# Altium PCB BACKUP_POWER.PcbDoc (part 2 of 2)
Units mm, origin at the board's own origin, x right, y up, seen from the top; angles counter-clockwise.
Board outline 100 x 100 mm, 2 copper layers (Top Layer, Bottom Layer); 154 components, 92 nets, 415 pads, 323 vias.
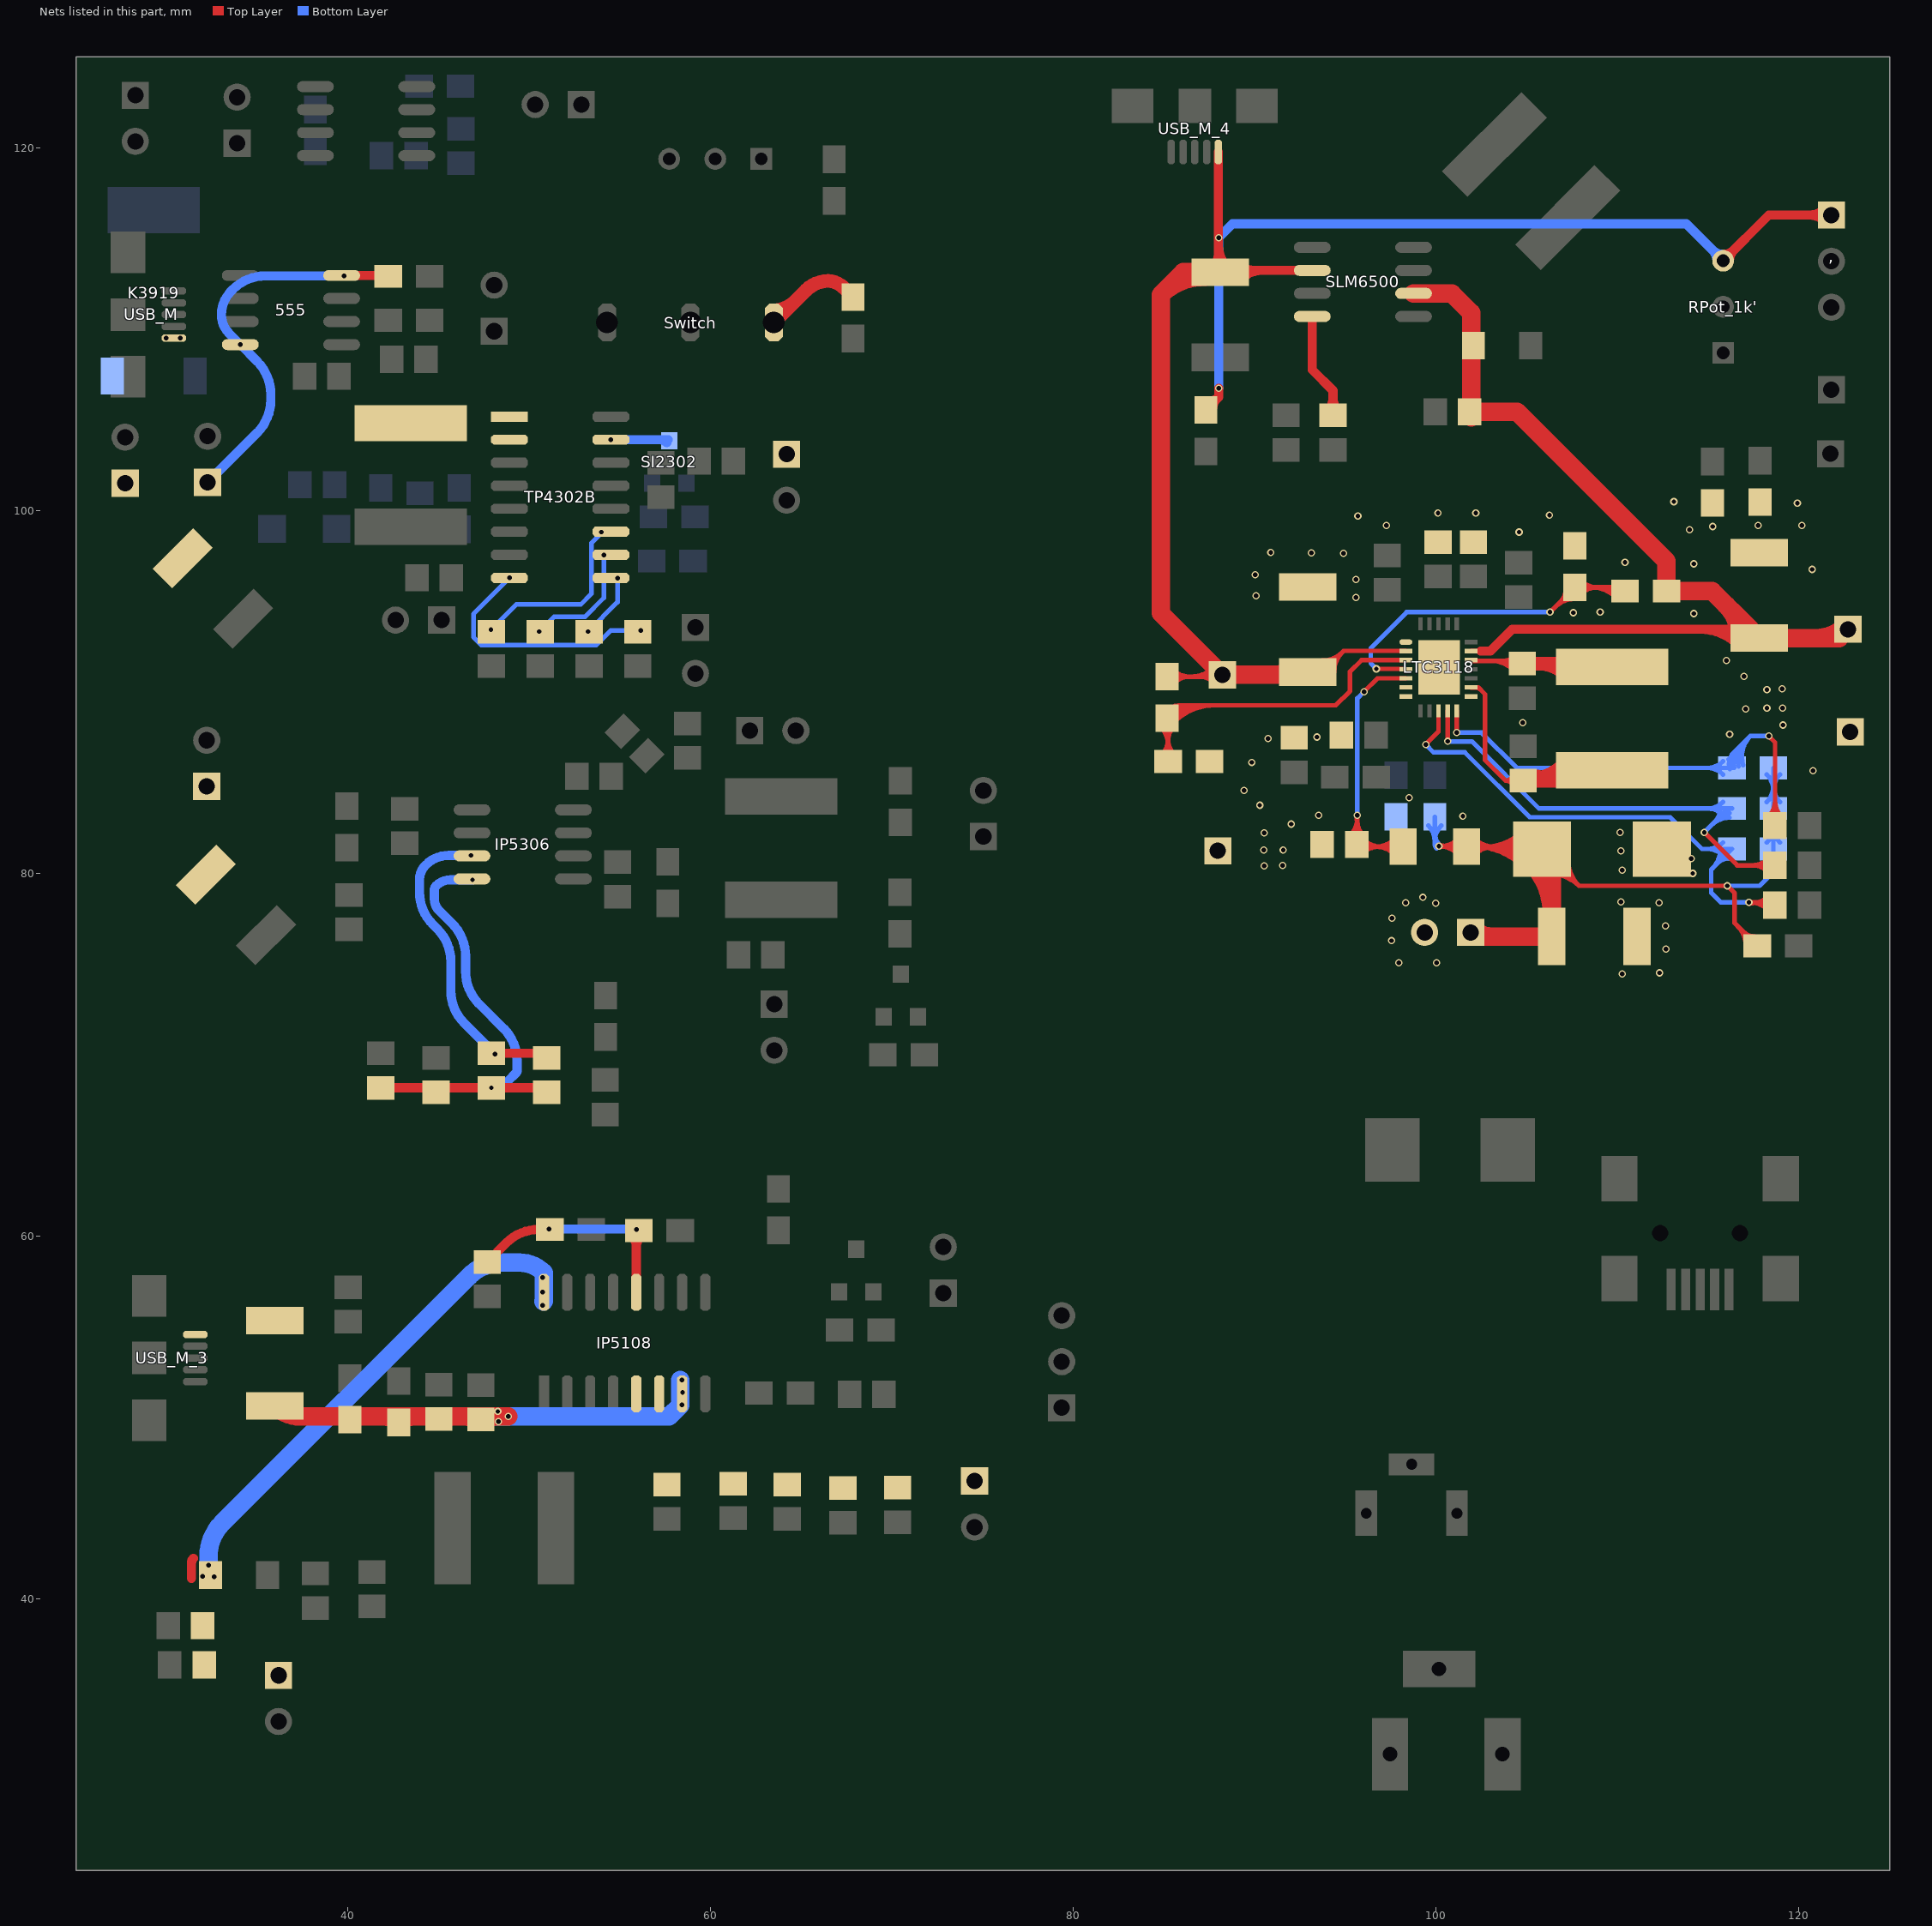
[diagram p2: the nets of this part, all layers, seen from the top]

## Via types
v1: diameter 0.406, hole 0.254, Top Layer to Bottom Layer, tented both sides, 316 vias
v2: diameter 3.8, hole 3, Top Layer to Bottom Layer, tented both sides, 4 vias
v3: diameter 1.6, hole 1.2, Top Layer to Bottom Layer, tented both sides, 3 vias

## Nets (pads, with @x,y where several pads share a name; then routed paths per layer and width w, separated by ;. In a path a pad name is that pad's centre, name@x,y a point inside that pad or via, vN(x,y) a via of type N, cw(c..) or ccw(c..) an arc to the next point about the centre after c; other vN are vias at no path point) (continued)
NetIP5306_3: IP5306.3 L3,.1 L4,.2 | length 17.7
  Top Layer w0.508: 47.904,70.062 50.343,70.062 cw(c50.343,69.2) 50.952,69.809
  Bottom Layer w0.508: v1(46.787,80.975) 45.56,80.975 ccw(c45.56,79.154) 44.272,80.442 ccw(c45.069,79.645) 43.942,79.645 43.942,78.954 ccw(c46.482,78.954) 44.686,77.158 44.925,76.919 cw(c43.129,75.122) 45.669,75.122 45.669,73.518 ccw(c48.209,73.518) 46.413,71.722 v1(48.108,70.028)
NetIP5306_4: IP5306.4 L1,.2 L2,.1 L3,.2 L4,.1 | length 24.8
  Top Layer w0.508: 41.808,68.162 v1(47.904,68.162) 50.343,68.162 cw(c50.343,67.3) 50.952,67.909
  Bottom Layer w0.508: v1(46.863,79.629) 45.654,79.629 ccw(c45.654,78.502) 44.856,79.299 ccw(c45.102,79.054) 44.755,79.054 44.755,78.588 ccw(c45.675,78.588) 45.024,77.937 45.738,77.223 cw(c43.942,75.427) 46.482,75.427 46.482,74.585 ccw(c49.022,74.585) 47.226,72.789 48.583,71.432 cw(c46.787,69.636) 49.327,69.636 49.327,69.139 cw(c49.082,69.139) 49.255,68.965 48.838,68.549 cw(c47.904,69.483) v1(47.904,68.162)
NetL1_1: L1.1 TP4302B.11 | length 10
  Bottom Layer w0.254: v1(47.879,93.421) 49.276,94.818 52.832,94.818 53.416,95.402 53.416,98.196 53.975,98.755 v1(53.975,98.806)
NetL2_1: L2.1 TP4302B.10 | length 6.7
  Bottom Layer w0.254: v1(50.546,93.32) 51.359,94.132 53.061,94.132 54.102,95.174 v1(54.102,97.536)
NetL3_1: L3.1 TP4302B.9 | length 3.6
  Bottom Layer w0.254: v1(53.238,93.32) 54.864,94.945 v1(54.864,96.266)
NetL4_1: L4.1 TP4302B.8 | length 13.8
  Bottom Layer w0.254: v1(48.903,96.281) 46.914,94.291 46.914,93.015 47.346,92.583 53.696,92.583 54.483,93.37 v1(56.134,93.37)
NetRED_2: RED.2 SLM6500.4 | length 7.4
  Top Layer w0.508: SLM6500.4@93.167,110.693 93.167,107.747 94.31,106.604 RED.2@94.31,105.242 ; RED.2@94.03,105.522 ccw(c93.354,106.198) 94.31,106.198 ccw(c95.266,106.198) RED.2@94.59,105.522
OUT_5V: 1K,.2 Switch.3 Vout_5V.1 | length 6.8
  Top Layer w0.762: Switch.3@63.48,110.363 65.267,112.15 cw(c66.472,110.945) 66.472,112.649 cw(c66.472,111.484) 67.296,112.308 67.843,111.76 ; Switch.3@63.48,111.032 ccw(c63.48,112.647) 64.622,111.505
PGND: 0,,.2 0,.2 1.8nf.1 4.7uf.2 22pf.1 22u.2 22uf,''.2 22uf,,''.2 47nf,.1 47nf.1 100K,,'.1 100K,,.1 100k.1 100uf'.2 "Vout 5V/1A.2" GNDv1.1 GNDv2.1 LTC3118.1 LTC3118.6 LTC3118.7 LTC3118.25
  other v1: 110.261,74.447 112.319,74.498 97.942,75.057 100.025,75.057 112.674,75.819 97.536,76.276 112.649,77.089 97.561,77.521 99.974,78.334 98.323,78.359 112.293,78.359 110.185,78.41 99.263,78.664 114.148,79.985 110.261,80.162 90.526,80.391 91.542,80.416 114.071,80.797 110.185,81.229 90.5,81.28 91.567,81.28 90.526,82.22 110.134,82.245 91.999,82.702 101.473,83.134 93.523,83.185 90.272,83.744 98.501,84.15 89.408,84.557 120.777,85.649 89.84,86.106 90.729,87.427 93.421,87.503 116.18,87.655 119.126,88.163 104.775,88.29 117.069,89.052 118.237,89.103 119.101,89.103 118.237,90.119 119.075,90.17 116.967,90.856 116.002,91.719 114.198,94.31 107.569,94.361 109.042,94.386 95.58,95.199 90.068,95.301 95.58,96.19 90.018,96.444 120.726,96.749 114.198,97.053 110.414,97.13 94.894,97.638 93.116,97.663 90.881,97.688 104.572,98.806 113.97,98.933 115.24,99.111 97.257,99.162 117.754,99.162 120.167,99.162 95.682,99.695 106.248,99.746 100.101,99.847 102.184,99.847 119.913,100.406 113.106,100.482
POW_GND: K3919.3 USB_M.5 Vin_5V.1
  other v1: 29.972,109.499 30.759,109.499
RUN1: 100K,,.2 100K,.1 LTC3118.3 | length 30.4
  Top Layer w0.254: 84.807,88.058 cw(c83.817,87.068) 85.217,87.068 ; 84.858,86.516 ccw(c83.991,87.383) 85.217,87.383 ccw(c86.443,87.383) 85.576,86.516 ; 84.987,88.238 cw(c84.43,87.682) 85.217,87.682 ; 84.987,88.851 cw(c85.963,87.874) 85.963,89.256 ; 85.166,88.671 cw(c86.577,87.261) 86.577,89.256 ; 85.217,86.157 85.217,88.494 85.166,88.544 85.877,89.256 ; 85.217,87.314 cw(c86.27,87.314) 85.525,88.058 ; 85.346,88.492 cw(c87.19,86.648) 87.19,89.256 ; 85.35,89.145 ccw(c85.529,89.604) 85.877,89.256 ; 85.525,88.312 cw(c87.803,86.035) 87.803,89.256 ; 85.673,88.708 cw(c86.375,88.758) 85.877,89.256 ; LTC3118.3@98.33,91.741 98.326,91.745 95.885,91.745 95.25,91.11 95.25,90.043 94.463,89.256 85.877,89.256
RUN2: 100K,'.1 100K,,'.2 LTC3118.4 | length 25.9
  Top Layer w0.254: v1(96.698,91.262) 98.309,91.262 LTC3118.4@98.33,91.241 ; v1(106.274,94.386) 107.645,95.758 110.211,95.758 110.414,95.555 ; 106.561,94.674 cw(c107.645,93.59) 107.645,95.123 ; 106.868,94.981 ccw(c106.217,95.631) 107.137,95.631 ; 106.995,95.108 cw(c107.645,94.457) 107.645,95.377 ; 108.004,95.399 cw(c108.872,94.532) 108.872,95.758 cw(c108.872,96.984) 108.004,96.117 ; 108.57,95.758 cw(c108.57,93.838) 109.928,95.196 ; 109.183,95.758 cw(c109.183,94.451) 110.107,95.375 ; 109.551,95.758 ccw(c109.551,96.291) 109.928,95.914
  Bottom Layer w0.254: v1(96.698,91.262) 96.393,91.567 96.393,92.405 98.374,94.386 v1(106.274,94.386)
SW: "2.2uH/5A SMD.1" TP4302B.1 TP4302B.2
SW1: 0.1uf,.2 3.3uH/5A,.1 LTC3118.17 | length 13.2
  Top Layer w0.254: LTC3118.17@101.93,91.741 101.963,91.707 104.594,91.707 104.75,91.552 ; 103.011,91.707 cw(c103.011,89.914) 104.28,91.182 ; 103.625,91.707 cw(c103.625,90.527) 104.459,91.362 ; 103.763,91.707 ccw(c103.763,92.439) 104.28,91.922
  Top Layer w0.762: 104.75,91.552 109.52,91.552 109.703,91.369 ; 105.667,91.552 cw(c105.667,89.433) 107.165,90.931 ; 106.55,91.552 ccw(c106.55,92.422) 107.165,91.807
SW2: 0.1uf,,.2 3.3uH/5A,.2 LTC3118.14 | length 18
  Top Layer w0.254: LTC3118.14@101.93,90.241 102.317,90.241 102.692,89.865 102.692,86.233 103.82,85.105 ; LTC3118.14@102.155,90.243 cw(c102.155,89.857) 102.427,90.13 ; 104.241,84.855 ccw(c103.82,84.626) 103.82,85.105 ; 104.241,85.355 cw(c103.82,85.585) 103.82,85.105 ; 104.8,85.105 103.82,85.105
  Top Layer w0.762: 105.133,84.971 cw(c105.772,84.602) 105.581,85.314 ; 106.606,85.105 ccw(c106.606,86.639) 107.705,85.569 ; 107.159,86.101 cw(c104.801,88.397) 104.801,85.105 109.139,85.105 109.703,85.669
SWT: SI2302.3 TP4302B.15 | length 3.6
  Bottom Layer w0.508: v1(54.491,103.901) SI2302.3@57.65,103.901 ; 57.154,103.901 cw(c57.154,103.312) SI2302.3@57.57,103.728
V1: 10K_1.2 LTC3118.10 V1.2 | length 35.5
  Top Layer w0.254: v1(99.422,87.097) 100.13,87.805 LTC3118.10@100.13,88.941 ; v1(117.246,78.384) 118.532,78.384 V1.2@118.684,78.232 ; v1@117.285,78.318 cw(c117.398,78.122) 117.457,78.341 ; v1@117.295,78.384 cw(c117.295,76.943) V1.2@118.314,77.962 ; 117.548,78.384 ccw(c117.548,79.468) V1.2@118.314,78.702 ; 117.908,78.384 cw(c117.908,77.556) V1.2@118.494,78.142
  Bottom Layer w0.254: v1(99.422,87.097) 99.854,86.665 101.575,86.665 105.156,83.083 112.903,83.083 114.656,81.331 10K_1.2@116.307,81.331 115.164,80.188 115.164,78.918 115.697,78.384 v1(117.246,78.384) ; 115.223,80.247 ccw(c114.139,81.331) 10K_1.2@115.672,81.331 ; 115.529,80.553 cw(c116.18,79.903) 10K_1.2@116.18,80.823 ; 115.656,80.68 ccw(c115.006,81.331) 10K_1.2@115.926,81.331 ; 10K_1.2@115.82,80.972 ccw(c114.953,80.104) 114.953,81.331 ccw(c114.953,82.557) 10K_1.2@115.82,81.69
V2: 10K_2.2 LTC3118.11 V2.2 | length 31.9
  Top Layer w0.254: v1(100.63,87.27) LTC3118.11@100.63,88.941 ; v1(114.783,82.245) 116.599,80.429 V2.2@118.684,80.429 ; V2.2@118.314,80.059 ccw(c117.421,79.166) 117.421,80.429 ccw(c117.421,81.692) V2.2@118.314,80.799
  Bottom Layer w0.254: v1(100.63,87.27) 100.638,87.262 101.968,87.262 105.664,83.566 10K_2.2@116.103,83.566 ; v1(114.783,82.245) 10K_2.2@116.103,83.566 ; 115.182,82.645 cw(c116.18,81.648) 10K_2.2@116.18,83.058 ; 115.366,82.829 ccw(c114.629,83.566) 10K_2.2@115.672,83.566 ; 10K_2.2@115.616,83.079 cw(c116.18,82.515) 10K_2.2@116.18,83.312 ; 10K_2.2@115.82,83.207 ccw(c114.953,82.34) 114.953,83.566 ccw(c114.953,84.792) 10K_2.2@115.82,83.925 ; 10K_2.2@116.307,83.566 10K_2.2@116.103,83.566
V_GOOD: 10K_3.2 LTC3118.12 V_good.2 | length 35.5
  Top Layer w0.254: v1(101.13,87.744) LTC3118.12@101.13,88.941 ; V_good.2@118.314,83.096 ccw(c117.421,83.989) 118.684,83.989 ccw(c119.947,83.989) V_good.2@119.054,83.096 ; v1(118.339,87.554) 118.684,87.208 V_good.2@118.684,82.626
  Bottom Layer w0.254: v1(101.13,87.744) 102.502,87.744 104.445,85.801 10K_3.2@116.307,85.801 116.307,86.538 ; 10K_3.2@115.82,85.442 ccw(c114.953,84.575) 114.953,85.801 ccw(c114.953,87.028) 10K_3.2@115.82,86.16 ; 10K_3.2@116.126,86.276 ccw(c116.027,86.538) 116.307,86.538 ; 10K_3.2@116.19,85.728 cw(c117.08,85.997) 116.423,86.654 ; 10K_3.2@116.434,85.801 cw(c117.541,86.136) 116.723,86.954 ; 10K_3.2@116.487,86.276 cw(c116.587,86.538) 116.307,86.538 ; 10K_3.2@116.677,85.875 cw(c118.001,86.276) 117.023,87.254 ; 10K_3.2@116.92,85.948 cw(c118.461,86.415) 117.323,87.554 ; v1(118.339,87.554) 117.323,87.554 ; 116.307,86.538 117.323,87.554
VBAT: 10mR.2 10u'.1 104''.1 BAT_4.2V_3.1 IP5108.16 | length 29.6
  Top Layer w0.508: 31.369,41.123 31.369,41.97 cw(c31.716,41.97) 31.471,42.215
  Bottom Layer w1.016: 32.309,41.173 32.309,42.356 cw(c34.849,42.356) 33.053,44.153 46.678,57.778 cw(c48.474,55.982) 48.474,58.522 49.451,58.522 cw(c49.451,56.614) 50.8,57.963 50.8,56.449 cw(c50.713,56.449) 50.775,56.388
  other v1: 32.614,41.199 31.979,41.224 32.309,41.834 50.724,56.159 50.724,56.896 50.724,57.709
VCC: 4.7uf.1 5819.2 LTC3118.5 | length 23
  Top Layer w0.254: 4.7uf.1@95.246,82.055 ccw(c94.255,83.045) v1@95.656,83.045 ; 4.7uf.1@95.426,81.875 ccw(c94.868,82.432) 95.656,82.432 ; v1@95.59,83.147 cw(c95.324,82.993) 95.621,82.914 ; 95.656,82.849 ccw(c96.78,82.849) 4.7uf.1@95.986,82.055 ; v1(95.656,83.185) 95.656,81.544 95.743,81.458 5819.2@98.176,81.458 ; 4.7uf.1@95.806,81.675 ccw(c96.33,82.199) 96.33,81.458 ; 4.7uf.1@95.986,81.115 cw(c96.813,80.287) 96.813,81.458 ; 4.7uf.1@95.986,81.855 ccw(c96.944,82.813) 96.944,81.458 ; v1(96.025,90.005) 96.761,90.741 LTC3118.5@98.33,90.741 ; 5819.2@97.736,81.017 ccw(c96.672,79.954) 96.672,81.458 ccw(c96.672,82.962) 5819.2@97.736,81.898 ; 5819.2@97.915,81.197 ccw(c97.285,80.567) 97.285,81.458 ccw(c97.285,82.349) 5819.2@97.915,81.719
  Bottom Layer w0.254: v1(95.656,83.185) 95.656,89.637 v1(96.025,90.005)
VCC_5108: "Fuse 2A 8V,,.1" USB_M_3.1
VIN: 1kr.2 2R,.2 10uf_1,,.1 104.1 "Fuse 2A 8V,,.2" IP5108.7 | length 29.2
  Top Layer w1.016: 35.966,50.622 ccw(c37.377,52.033) 37.377,50.038 v1(48.844,50.038) ; 42.002,50.038 cw(c42.002,49.038) 1kr.2@42.709,49.745 ; 1kr.2@42.889,49.745 cw(c43.596,49.038) 43.596,50.038 ; 44.235,50.038 cw(c44.235,49.227) 44.808,49.8 ; 45.209,49.8 cw(c45.783,49.227) 45.783,50.038 ; 46.485,50.038 cw(c46.485,49.14) 104.1@47.12,49.775 ; 104.1@47.521,49.775 cw(c48.156,49.14) 48.156,50.038
  Bottom Layer w1.016: 48.057,50.038 v1(48.844,50.038) 57.709,50.038 58.318,50.648 v1@58.318,52.045
  other v1: 48.285,49.759 48.26,50.317 58.42,50.673 58.445,51.359 58.42,52.045
VIN1: 1K,'.1 22uf,''.1 47uf'.1 100K,.2 ,.1 LTC3118.2 RPot_1k'.3 SLM6500.2 USB_M_4.1 VIN1.1 | length 120.6
  Top Layer w0.254: 85.166,90.83 88.113,90.83 VIN1.1@88.214,90.932 ; 85.525,90.471 cw(c86.393,89.604) 86.393,90.83 cw(c86.393,92.057) 85.525,91.19 ; 86.465,90.83 ccw(c86.465,92.681) VIN1.1@87.774,91.373 ; 86.955,90.83 cw(c86.955,89.673) VIN1.1@87.774,90.491 ; 87.078,90.83 ccw(c87.078,92.068) VIN1.1@87.953,91.193 ; 93.599,90.932 92.761,90.932 92.913,91.084 93.726,91.084 94.882,92.241 ; 93.739,91.465 ccw(c93.739,92.355) 94.367,91.726 ; 93.739,91.719 ccw(c93.739,93.222) 94.801,92.159 ; 94.12,91.084 cw(c95.07,91.084) 94.398,91.756 ; 94.374,91.084 cw(c95.937,91.084) 94.832,92.19 ; 94.882,92.253 LTC3118.2@98.33,92.253
  Top Layer w0.508: 87.3,105.537 88.011,106.248 ; 87.362,106.04 ccw(c87.484,106.775) 88.011,106.248 ; 87.681,105.664 cw(c88.294,105.664) 87.86,106.098 ; 47uf'.1@87.728,113.491 ccw(c87.095,114.124) 87.99,114.124 ; 87.99,114.592 ccw(c89.548,114.592) 47uf'.1@88.446,113.491 ; USB_M_4.1@87.99,119.761 87.99,113.229 47uf'.1@88.087,113.132 88.189,113.233 SLM6500.2@93.167,113.233 ; v1(88.011,106.731) 88.011,106.248 ; 47uf'.1@89.272,112.772 cw(c90.384,111.66) 90.384,113.233 ; 47uf'.1@89.272,113.491 ccw(c89.894,114.113) 89.894,113.233 ; RPot_1k'.3@115.824,113.767 118.339,116.281 121.793,116.281 ; RPot_1k'.3@115.824,114.113 ccw(c115.824,114.948) 116.415,114.357 ccw(c117.005,113.767) RPot_1k'.3@116.17,113.767 ; 121.442,115.93 ccw(c120.596,115.084) 120.596,116.281 ccw(c120.596,117.479) 121.442,116.632
  Top Layer w1.016: 47uf'.1@87.258,112.878 ccw(c87.203,109.495) 84.811,111.887 ; 47uf'.1@88.087,113.132 86.055,113.132 84.811,111.887 ; 91.107,90.932 ccw(c91.107,92.066) 91.908,91.264 ; 92.761,90.932 VIN1.1@88.214,90.932 84.811,94.336 84.811,111.887
  Bottom Layer w0.508: v1(88.011,106.731) v1(88.011,115.037) 88.773,115.799 113.792,115.799 RPot_1k'.3@115.824,113.767 ; RPot_1k'.3@115.478,113.767 ccw(c114.643,113.767) 115.233,114.357 ccw(c115.824,114.948) RPot_1k'.3@115.824,114.113
VIN2: 0.067.1 22uf,'.2 22uf,,''.1 100K,'.2 LTC3118.18 SLM6500.6 VIN2.1 | length 59.7
  Top Layer w0.254: LTC3118.18@101.93,92.241 102.452,92.241 ; 117.704,93.447 117.805,93.345
  Top Layer w0.508: 102.452,92.241 102.985,92.241 104.191,93.447 117.323,93.447 117.704,93.447 ; 114.588,93.447 cw(c114.588,90.572) 116.62,92.605 ; 115.815,93.447 cw(c115.815,91.799) 116.98,92.964
  Top Layer w1.016: SLM6500.6@98.755,111.963 100.863,111.963 101.94,110.886 101.94,105.435 ; 101.839,105.435 101.94,105.435 ; 101.94,105.131 101.94,105.435 ; 115.962,94.807 cw(c114.12,92.964) 116.726,92.964 ; 117.323,93.447 115.214,95.555 112.7,95.555 112.7,97.206 104.47,105.435 101.94,105.435 ; 117.805,92.964 122.225,92.964 VIN2.1@122.707,93.447 ; 120.958,92.964 ccw(c120.958,95.196) VIN2.1@122.536,93.618
VIN_5V: 135k.1 555.4 555.8 "Fuse 2A 8V.1" P_2_4302.1 | length 21.9
  Top Layer w0.508: 555.8@39.649,112.954 135k.1@42.164,112.954
  Bottom Layer w0.508: P_2_4302.1@32.258,101.549 34.994,104.285 ccw(c33.198,106.081) 35.738,106.081 35.738,106.415 ccw(c33.198,106.415) 34.994,108.211 v1(34.061,109.144) 33.451,109.754 cw(c34.492,110.795) 33.02,110.795 cw(c34.86,110.795) 33.559,112.096 33.648,112.184 cw(c35.444,110.388) 35.444,112.928 v1(39.776,112.928)
VIN_5V_2: "Fuse 2A 8V,.1" P_2_5306.1
VOUT: 3.3nf.2 10uf''.1 10uf'.1 47uf.1 104,.1 IP5108.5 IP5108.6 Vout_5V_3.1
VOUT_3118: 1.5k.1 10K_1.1 10K_2.1 10K_3.1 22u.1 100uf'.1 402k.2 5819.1 "Vout 5V/1A.1" LTC3118.13 | length 91.3
  Top Layer w0.254: v1@100.19,81.549 ccw(c100.318,81.771) 100.384,81.524 ; v1@100.233,81.483 ccw(c100.233,82.901) 5819.1@101.236,81.898 ; 100.749,81.483 cw(c100.749,80.566) 5819.1@101.41,81.202 ; 100.847,81.483 ccw(c100.847,82.287) 5819.1@101.415,81.719 ; 5819.1@101.227,81.026 ccw(c100.152,79.991) v1(100.152,81.483) 101.651,81.483 5819.1@101.676,81.458 105.715,81.458 100uf'.1@105.842,81.331 106.375,80.797 107.874,79.299 ; 5819.1@101.937,81.197 cw(c102.567,80.567) 102.567,81.458 cw(c102.567,82.349) 5819.1@101.937,81.719 ; 5819.1@102.085,81.458 cw(c102.085,77.649) 100uf'.1@104.778,80.342 ; 5819.1@102.117,81.017 cw(c103.18,79.954) 103.18,81.458 cw(c103.18,82.962) 5819.1@102.117,81.898 ; 100uf'.1@104.778,82.319 cw(c102.698,84.399) 102.698,81.458 cw(c102.698,78.262) 100uf'.1@104.958,80.522 ; 100uf'.1@104.958,82.14 cw(c103.312,83.786) 103.312,81.458 cw(c103.312,78.876) 100uf'.1@105.137,80.701 ; 100uf'.1@105.137,81.96 cw(c103.925,83.173) 103.925,81.458 cw(c103.925,79.489) 100uf'.1@105.317,80.881 ; 100uf'.1@106.01,80.446 cw(c106.152,79.084) 100uf'.1@107.12,80.052 ; 100uf'.1@106.036,80.193 cw(c106.224,78.402) 107.497,79.676 ; 100uf'.1@106.063,79.94 cw(c106.295,77.721) 107.874,79.299 ; 100uf'.1@106.795,81.185 ccw(c108.139,80.961) 100uf'.1@107.175,79.997 ; 100uf'.1@107.045,81.143 ccw(c108.738,80.861) 107.525,79.648 ; 100uf'.1@107.296,81.101 ccw(c109.337,80.762) 107.874,79.299 ; 116.62,77.081 cw(c115.536,75.997) 1.5k.1@117.069,75.997 ; 116.926,76.774 ccw(c117.577,77.425) 1.5k.1@117.577,76.505 ; 117.053,76.647 cw(c116.403,75.997) 1.5k.1@117.323,75.997 ; 1.5k.1@117.704,75.997 116.459,77.241 116.459,78.892 v1(116.053,79.299) 107.874,79.299
  Top Layer w1.016: 101.905,76.733 102.133,76.505 22u.1@106.375,76.505 100uf'.1@106.375,80.797 ; 102.076,76.905 ccw(c103.041,77.87) 103.041,76.505 ; 100uf'.1@105.198,80.612 cw(c102.355,77.769) 22u.1@106.375,77.769
  Bottom Layer w0.254: 402k.2@99.564,82.623 cw(c98.697,81.755) 99.924,81.755 cw(c101.15,81.755) 402k.2@100.283,82.623 ; 99.924,81.606 ccw(c100.275,81.606) v1@100.026,81.357 ; 99.924,82.219 ccw(c100.888,82.219) v1@100.206,81.537 ; 402k.2@99.924,83.109 99.924,81.712 v1(100.152,81.483) ; v1(116.053,79.299) 117.831,79.299 118.593,80.061 10K_1.1@118.593,81.331 10K_3.1@118.593,85.801 ; 10K_1.1@118.233,80.972 cw(c117.366,80.104) 118.593,80.104 cw(c119.819,80.104) 10K_1.1@118.952,80.972 ; 10K_1.1@118.233,81.69 ccw(c117.366,82.557) 118.593,82.557 ccw(c119.819,82.557) 10K_1.1@118.952,81.69 ; 10K_2.1@118.233,83.207 cw(c117.366,82.34) 118.593,82.34 cw(c119.819,82.34) 10K_2.1@118.952,83.207 ; 10K_2.1@118.233,83.925 ccw(c117.366,84.792) 118.593,84.792 ccw(c119.819,84.792) 10K_2.1@118.952,83.925 ; 10K_3.1@118.233,85.442 cw(c117.366,84.575) 118.593,84.575 cw(c119.819,84.575) 10K_3.1@118.952,85.442
VREG: 2.2uf.2 3.3K,.1 3.3K.1 IP5108.12 | length 14.2
  Top Layer w0.508: 2.2uf.2@47.676,58.557 48.725,59.606 cw(c50.521,57.81) 50.521,60.35 3.3K.1@51.13,60.35 ; 55.636,60.03 cw(c55.021,59.415) 55.891,59.415 ; IP5108.12@55.891,56.879 55.891,59.958 ; 55.891,59.345 cw(c56.86,59.345) 56.175,60.03 ; 55.891,59.958 cw(c56.374,59.958) 56.032,60.3 ccw(c56.374,59.958) 55.891,59.958
  Bottom Layer w0.508: v1(51.079,60.376) 55.844,60.376 cw(c55.844,60.289) v1(55.905,60.35)
pads on no net: Designator194.1 Designator194.2 Designator196.1 Designator196.2 Designator196.3 Designator196.4 Designator196.5 Designator196.MH1 Designator196.MH2 Designator200.1 Designator200.2 Designator200.3 Designator201.1 Designator201.2 Designator201.3 IP5108.13 Switch.1 USB_M.2 USB_M.3 USB_M.4 USB_M.6 USB_M.7 USB_M.8 USB_M_3.2 USB_M_3.3 USB_M_3.4 USB_M_3.6 USB_M_3.7 USB_M_3.8 USB_M_4.2 USB_M_4.3 USB_M_4.4 USB_M_4.6 USB_M_4.7 USB_M_4.8
copper on no net:
  other v2: 91.669,27.661 76.327,64.846 91.669,65.862 76.327,121.361

## Polygon pours and split planes (outlines as drawn)
PGND on Top Layer "Top Layer-No Net" (solid, pour order 45): 81.509,100.686 81.509,76.505 ccw(c84.049,76.505) 84.049,73.965 120.371,73.965 121.869,73.965 ccw(c121.869,76.505) 124.409,76.505 124.409,97.866 124.409,99.847 ccw(c121.869,99.847) 121.869,102.387 83.744,102.387 83.718,102.387 ccw(c83.718,100.178) 81.509,100.178
GND_6500 on Top Layer "Top Layer-No Net" (solid, pour order 41): 81.407,124.409 81.407,104.191 ccw(c83.947,104.191) 83.947,101.651 116.586,101.651 121.945,101.651 ccw(c121.945,104.191) 124.485,104.191 124.485,120.498 124.485,121.869 ccw(c121.945,121.869) 121.945,124.409 82.448,124.409
VOUT_3118 on Top Layer "Top Layer-No Net" (solid, pour order 33): 101.524,89.84 101.524,85.095 ccw(c103.865,85.095) 102.21,83.439 102.913,82.735 cw(c101.117,80.939) 103.657,80.939 103.657,80.416 ccw(c104.393,80.416) 103.873,79.896 104.496,79.273 ccw(c104.68,79.457) 104.68,79.197 107.34,79.197 ccw(c107.34,79.688) 107.687,79.341 107.823,79.477 ccw(c107.639,79.661) 107.899,79.661 107.899,82.956 ccw(c106.427,81.485) 106.427,83.566 104.623,83.566 cw(c104.623,85.038) 103.582,83.997 102.743,84.836 cw(c103.663,85.756) 102.362,85.756 102.362,89.637 102.362,89.793 ccw(c102.189,89.793) 102.311,89.916 ccw(c102.25,89.855) 102.25,89.941 101.6,89.941 101.524,89.941
GND on Top Layer "Top Layer-No Net" (solid, pour order 54): 26.702,125.178 25.051,123.527 25.051,91.103 26.137,89.992 26.162,89.586 25.044,88.519 25.044,63.932 26.873,61.57 81.255,61.671 80.975,125.178
GND_5108 on Top Layer "Top Layer-No Net" (solid, pour order 52): 26.848,61.392 25,59.036 24.968,28.194 25.959,26.06 28.594,25 82.728,24.968 82.728,59.817 81.204,61.493 27.534,61.417
VBAT on Top Layer "Top Layer-No Net" (solid, pour order 50): 31.344,41.656 ccw(c31.895,41.104) 31.115,41.104 31.115,39.776 31.115,35.756 ccw(c31.895,35.756) 31.344,35.204 ccw(c32.447,36.308) 32.447,34.747 37.059,34.747 ccw(c36.507,35.299) 37.287,35.299 37.287,35.484 37.287,36.247 ccw(c36.247,36.247) 36.982,36.982 ccw(c36.553,36.553) 36.553,37.16 33.884,37.16 cw(c35.049,38.325) 33.401,38.325 33.401,41.707 33.401,41.906 ccw(c32.534,41.906) 33.147,42.52 cw(c33.086,42.581) 33.086,42.494 31.598,42.494 31.538,42.494 ccw(c31.538,42.147) 31.293,42.393
CSIN on Top Layer "Top Layer-No Net" (solid, pour order 49): 44.196,46.965 44.196,45.401 cw(c41.656,45.401) 43.452,43.604 43.409,43.561 43.238,43.391 cw(c41.442,45.187) 41.442,42.647 34.798,42.647 ccw(c35.534,41.911) 34.493,41.911 34.493,40.335 ccw(c34.8,40.642) 34.8,40.208 35.687,40.208 36.574,40.208 ccw(c36.574,40.642) 36.881,40.335 cw(c37.31,39.906) 37.31,40.513 42.139,40.513 46.595,40.513 ccw(c46.595,41.467) 47.269,40.792 ccw(c47.208,40.854) 47.295,40.854 47.295,47.092 ccw(c46.927,46.724) 46.927,47.244 44.45,47.244 44.38,47.244 ccw(c44.38,46.984) 44.196,47.168
VOUT on Top Layer "Top Layer-No Net" (solid, pour order 48): 55.397,51.714 55.397,47.737 ccw(c57.937,47.737) 56.141,45.941 56.718,45.364 ccw(c57.086,45.732) 57.086,45.212 75.26,45.212 ccw(c75.26,45.764) 75.65,45.374 75.87,45.593 cw(c75.931,45.654) 75.844,45.654 75.844,47.473 ccw(c75.476,47.105) 75.476,47.625 59.055,47.625 58.529,48.151 cw(c60.325,49.947) 57.785,49.947 57.785,50.546 57.785,52.143 ccw(c56.918,52.143) 57.531,52.756 ccw(c57.347,52.572) 57.347,52.832 55.474,52.832
LX on Top Layer "Top Layer-No Net" (solid, pour order 47): 52.832,52.045 52.832,50.633 cw(c50.292,50.633) 52.088,48.837 50.546,47.295 ccw(c51.404,46.436) 50.19,46.436 50.19,40.742 ccw(c50.865,40.742) 50.388,40.265 50.419,40.234 ccw(c50.542,40.356) 50.542,40.183 52.476,40.183 52.555,40.183 ccw(c52.555,40.79) 52.984,40.361 ccw(c52.371,40.974) 53.238,40.974 53.238,47.498 cw(c53.606,47.498) 53.346,47.758 54.737,49.149 ccw(c53.572,50.314) 55.22,50.314 55.22,52.426 55.22,52.439 ccw(c54.699,52.439) 55.067,52.807 ccw(c54.945,52.684) 54.945,52.857 52.934,52.857
VCC_5108 on Top Layer "Top Layer-No Net" (solid, pour order 46): 30.607,54.534 ccw(c31.098,55.024) 31.098,54.331 32.715,54.331 37.677,54.331 ccw(c37.677,54.677) 37.922,54.432 ccw(c37.37,54.984) 38.151,54.984 38.151,56.236 ccw(c37.538,55.622) 37.538,56.49 33.909,56.49 ccw(c33.909,56.06) 33.605,56.364 32.842,55.601 cw(c31.861,56.582) 31.861,55.194 30.709,55.194
Net2R_2 on Top Layer "Top Layer-No Net" (solid, pour order 43): 33.63,75.514 34.607,74.537 ccw(c34.823,74.754) 34.823,74.447 ccw(c34.823,74.938) 35.17,74.591 37.744,77.165 ccw(c36.641,78.269) 38.202,78.269 38.202,82.042 38.296,82.136 cw(c40.092,80.34) 40.092,82.88 47.879,82.88 48.069,83.07 ccw(c47.852,83.287) 48.158,83.287 48.158,83.552 ccw(c47.204,83.552) 47.879,84.226 ccw(c47.143,83.491) 47.143,84.531 38.405,84.531 ccw(c38.405,83.427) 37.624,84.208 36.728,83.312 36.304,82.888 ccw(c38.1,81.091) 35.56,81.091 35.56,79.248 cw(c34.272,79.248) 35.183,78.337 33.503,76.657 ccw(c33.993,76.167) 33.299,76.167 33.299,76.022
VIN_5V_2 on Top Layer "Top Layer-No Net" (solid, pour order 42): 29.972,85.065 29.972,79.995 ccw(c32.512,79.995) 30.716,78.199 31.14,77.775 ccw(c31.14,79.798) 32.571,78.367 33.503,79.299 ccw(c31.847,80.954) 34.188,80.954 34.188,84.836 33.369,85.656 ccw(c32.588,84.875) 32.588,85.979 30.609,85.979 ccw(c30.609,85.545) 30.302,85.852
Net10uf_3_2 on Top Layer "Top Layer-No Net" (solid, pour order 38): 53.238,100.965 ccw(c53.545,101.272) 53.545,100.838 55.88,100.838 56.01,100.708 cw(c55.403,100.101) 56.261,100.101 ccw(c57.365,101.205) 57.365,99.644 64.795,99.644 64.807,99.655 ccw(c63.853,100.609) 65.202,100.609 65.202,100.682 ccw(c64.335,100.682) 64.948,101.295 ccw(c64.457,100.805) 64.457,101.498 56.82,101.498 ccw(c56.758,101.498) 56.802,101.542 56.617,101.727 ccw(c56.31,101.42) 56.31,101.854 53.238,101.854
OUT_5V on Top Layer "Top Layer-No Net" (solid, pour order 37): 62.662,110.973 62.662,103.592 ccw(c65.202,103.592) 63.406,101.796 63.525,101.676 ccw(c63.587,101.738) 63.587,101.651 65.253,101.651 ccw(c64.455,102.448) 65.583,102.448 65.583,104.089 65.583,109.362 ccw(c63.043,109.362) 64.839,111.158 63.932,112.065 63.802,112.065 ccw(c63.802,110.417) 62.636,111.582
Net10uf_3_1 on Top Layer "Top Layer-No Net" (solid, pour order 36): 53.315,102.006 59.426,102.006 ccw(c59.426,103.134) 60.223,102.337 ccw(c60.039,102.521) 60.3,102.521 60.3,111.557 ccw(c59.564,110.821) 59.564,111.862 58.623,111.862 58.51,111.862 ccw(c58.51,110.908) 57.836,111.582 ccw(c58.51,110.908) 57.556,110.908 57.556,104.191 cw(c56.269,105.479) 56.269,103.657 56.083,103.657 ccw(c56.083,103.596) 56.04,103.639 55.651,103.251 53.796,103.251 ccw(c53.796,102.21) 53.061,102.946 cw(c52.938,102.824) 53.111,102.824 53.111,102.006
VIN_5V on Top Layer "Top Layer-No Net" (solid, pour order 34): 31.115,102.438 31.115,101.128 cw(c28.575,101.128) 30.371,99.332 28.346,97.307 ccw(c30.247,97.307) 28.903,95.963 29.693,95.174 ccw(c29.693,97.32) 31.21,95.802 33.122,97.714 ccw(c32.14,98.695) 33.528,98.695 33.528,102.438 ccw(c32.915,101.825) 32.915,102.692 31.394,102.692 31.324,102.692 ccw(c31.324,102.432) 31.14,102.616
5V_IN on Top Layer "Top Layer-No Net" (solid, pour order 32): 29.54,112.446 29.54,112.014 ccw(c29.718,112.014) 29.718,111.836 31.09,111.836 cw(c31.09,111.379) 31.547,111.379 31.547,107.823 cw(c29.007,107.823) 29.007,105.283 27.127,105.283 ccw(c27.127,104.572) 26.416,104.572 26.416,103.556 ccw(c27.026,103.556) 27.026,102.946 32.233,102.946 ccw(c32.233,104.14) 33.426,104.14 33.426,104.292 33.426,107.544 ccw(c32.791,107.544) 32.791,108.179 cw(c32.791,108.331) 32.639,108.331 32.639,111.608 ccw(c31.598,111.608) 31.598,112.649 29.667,112.649 29.616,112.649 ccw(c29.616,112.573) 29.54,112.573
SW on Top Layer "Top Layer-No Net" (solid, pour order 30): 47.6,103.276 49.479,103.276 ccw(c49.479,104.038) 50.241,104.038 50.241,105.486 ccw(c49.657,105.486) 49.657,106.07 40.361,106.07 ccw(c40.361,105.486) 39.776,105.486 39.776,104.419 ccw(c40.919,104.419) 40.919,103.276
BAT on Top Layer "Top Layer-No Net" (solid, pour order 29): 44.12,94.945 ccw(c44.181,94.884) 44.094,94.884 44.094,92.964 ccw(c44.217,92.964) 44.13,92.877 44.145,92.862 ccw(c44.207,92.924) 44.207,92.837 46.101,92.837 ccw(c46.101,92.898) 46.144,92.855 46.203,92.913 ccw(c45.037,94.078) 46.685,94.078 46.685,96.241 cw(c46.869,96.241) 46.739,96.371 47.193,96.825 cw(c47.561,96.457) 47.561,96.977 49.86,96.977 ccw(c49.86,97.345) 50.12,97.085 50.216,97.18 ccw(c50.032,97.364) 50.292,97.364 50.292,98.019 ccw(c50.231,98.019) 50.274,98.062 50.14,98.196 cw(c50.078,98.258) 50.078,98.171 47.625,98.171 cw(c47.625,98.355) 47.495,98.225 47.32,98.4 cw(c47.382,98.461) 47.295,98.461 47.295,100.279 ccw(c46.866,100.279) 47.169,100.583 47.092,100.66 ccw(c46.969,100.538) 46.969,100.711 40.386,100.711 ccw(c40.386,100.404) 40.169,100.621 39.903,100.355 ccw(c40.271,99.987) 39.751,99.987 39.751,97.663 ccw(c39.812,97.663) 39.769,97.62 39.853,97.536 ccw(c40.037,97.72) 40.037,97.46 44.552,97.46 cw(c44.552,97.215) 44.725,97.388 44.78,97.333 cw(c44.719,97.271) 44.806,97.271 44.806,95.199 cw(c44.683,95.199) 44.77,95.112 44.704,95.047
no net on Top Solder "Top Layer-No Net" (solid): 44.398,98.819 44.493,98.725 ccw(c46.289,100.521) 46.289,97.981 49.351,97.981 cw(c49.351,97.429) 49.742,97.819 49.783,97.778 cw(c49.599,97.594) 49.859,97.594 49.859,97.346 47.171,97.346 ccw(c47.171,96.479) 46.557,97.092 ccw(c47.661,95.988) 46.1,95.988 46.1,95.746 45.376,95.746 cw(c45.376,96.266) 45.008,95.898 cw(c45.253,96.143) 44.906,96.143 44.906,97.727 ccw(c44.17,97.727) 44.691,98.247 44.525,98.413
no net on Bottom Solder "Top Layer-No Net" (solid): 38.756,98.501 ccw(c39.185,98.93) 39.185,98.323 49.856,98.323 ccw(c49.856,98.507) 49.986,98.377 50.135,98.527 50.135,99.009 ccw(c49.89,99.009) 50.063,99.183 49.957,99.289 ccw(c49.835,99.166) 49.835,99.339 39.213,99.339
PGND on Bottom Layer "Top Layer-No Net" (solid, pour order 44): 81.458,100.686 81.458,76.505 ccw(c83.998,76.505) 83.998,73.965 120.32,73.965 121.818,73.965 ccw(c121.818,76.505) 124.358,76.505 124.358,97.866 124.358,99.847 ccw(c121.818,99.847) 121.818,102.387 83.693,102.387 83.668,102.387 ccw(c83.668,100.178) 81.458,100.178
GND_6500 on Bottom Layer "Top Layer-No Net" (solid, pour order 39): 81.407,124.409 81.407,104.191 ccw(c83.947,104.191) 83.947,101.651 116.586,101.651 121.945,101.651 ccw(c121.945,104.191) 124.485,104.191 124.485,120.498 124.485,121.869 ccw(c121.945,121.869) 121.945,124.409 82.448,124.409
GND on Bottom Layer "Top Layer-No Net" (solid, pour order 53): 26.702,125.178 25.051,123.527 25.051,91.103 26.137,89.992 26.162,89.586 25.044,88.519 25.044,63.932 26.873,61.57 81.255,61.671 80.975,125.178
GND_5108 on Bottom Layer "Top Layer-No Net" (solid, pour order 51): 26.848,61.392 25,59.036 24.968,28.194 25.959,26.06 28.594,25 82.728,24.968 82.728,59.817 81.204,61.493 27.534,61.417
5V_IN on Bottom Layer "Top Layer-No Net" (solid, pour order 40): 26.797,107.137 26.797,103.856 ccw(c28.175,103.856) 27.201,102.881 ccw(c27.964,103.644) 27.964,102.565 29.108,102.565 29.108,89.012 ccw(c31.648,89.012) 29.852,87.216 30.81,86.258 ccw(c31.055,86.504) 31.055,86.157 33.122,86.157 ccw(c32.324,86.954) 33.452,86.954 33.452,87.579 31.961,89.07 cw(c33.757,90.867) 31.217,90.867 31.217,102.54 31.219,102.542 cw(c32.563,101.198) 32.563,103.099 ccw(c30.846,104.816) 33.274,104.816 33.274,108.229 ccw(c31.557,106.512) 31.557,108.941 30.074,108.941
Net0.25R_2 on Bottom Layer "Top Layer-No Net" (solid, pour order 35): 32.029,92.812 32.193,92.648 ccw(c33.884,94.34) 33.884,91.948 ccw(c33.884,92.071) 33.97,91.984 36.271,94.285 ccw(c34.554,96.002) 36.982,96.002 36.982,99.695 ccw(c36.86,99.695) 36.946,99.782 36.5,100.228 ccw(c36.438,100.167) 36.438,100.254 34.696,100.254 ccw(c34.696,100.07) 34.566,100.2 34.468,100.101 ccw(c34.59,99.979) 34.417,99.979 34.417,97.434 34.417,97.267 cw(c31.877,97.267) 33.673,95.471 32.004,93.802 ccw(c32.372,93.434) 31.852,93.434 31.852,93.294
POW_GND on Bottom Layer "Top Layer-No Net" (solid, pour order 31): 25.222,101.956 ccw(c26.67,101.956) 26.67,100.508 27.788,100.508 28.423,100.508 ccw(c28.423,100.863) 28.778,100.863 28.778,102.108 ccw(c28.194,102.108) 28.194,102.692 27.864,102.692 cw(c27.864,103.937) 26.619,103.937 26.619,104.343 cw(c27.762,104.343) 27.762,105.486 ccw(c27.762,105.943) 28.219,105.943 28.219,107.62 cw(c29.286,107.62) 29.286,108.687 30.328,108.687 30.912,108.687 ccw(c30.912,109.372) 31.598,109.372 ccw(c31.191,109.372) 31.191,109.779 29.388,109.779 ccw(c29.388,109.499) 29.108,109.499 29.108,109.449 ccw(c29.083,109.449) 29.083,109.474 27.026,109.474 26.187,109.474 ccw(c26.187,108.56) 25.273,108.56

## Keep-outs
Keep-Out Layer:
  lines w0.254: 24.994,63.754 24.994,88.341 25.959,89.306 ccw(c25.629,89.637) 25.959,89.967 25,90.926 25,123.349 26.651,125 123.133,125 125,123.133 125,74.606 123.419,73.025 85.446,73.025 84.023,71.603 84.023,69.799 85.42,68.402 123.495,68.402 124.943,66.954 124.943,27.661 122.453,25.171 90.373,25.171 89.027,26.518 89.027,57.404 87.427,59.004 85.75,59.004 84.125,57.379 84.125,26.086 83.039,25 28.594,25 cw(c28.635,28.635) 25,28.677 25,59.036 26.391,60.427 ccw(c25.425,61.392) 26.391,62.357 24.994,63.754

## Other copper
Top Layer:
  text "KUNYEE_Staok" at 25.552,95.987 h1.52 r315
  text "画的什么玩意。。" at 96.799,55.982 h5 r315

## Silkscreen, mask and mechanical layers (free items; w line width, h text height)
Top Overlay:
  lines w0.2: 26.721,89.637 74.955,89.637 ; 27.584,61.468 81.229,61.468 82.728,59.969 82.728,57.798 ; 31.674,124.79 31.674,119.202 34.036,116.84 53.543,116.84 55.093,118.389 ; 36.525,89.637 ccw(c39.002,92.113) 41.478,89.637 cw(c43.955,87.16) 46.431,89.637 ; 38.913,59.842 38.913,62.789 ; 41.504,59.538 41.504,62.636 ; 43.053,60.122 43.053,63.297 ; 56.236,121.895 56.236,124.435 ; 66.7,38.811 ccw(c73.52,39.51) 74.219,32.69 ; 67.767,68.301 ccw(c74.587,68.999) 75.286,62.179 ; 68.174,96.088 ccw(c74.993,96.787) 75.692,89.967 ; 68.961,113.436 cw(c66.307,110.63) 69.113,107.975 ; 72.034,86.639 cw(c69.38,83.833) 72.187,81.178 ; 80.994,63.392 78.874,65.512 78.874,122.943 80.061,124.13 80.977,124.13 80.977,103.071 82.474,101.575 112.979,101.575 ; 81.033,63.373 81.033,100.806
  text "+ IN" at 25.806,124.028 h1.52 r270
  text "+" at 31.623,122.86 h2.54
  text "+" at 49.682,119.888 h2.54
  text "5v TS GND" at 123.52,116.586 h1.52 r270
  text "Auto_Display1" at 44.78,114.503 h1.52
  text "NTC GND" at 123.52,107.493 h1.52 r270
  text "+" at 63.729,104.623 h2.54
  text "充完" at 95.352,104.013 h1.52
  text "+" at 25.222,103.861 h2.54
  text "充电" at 88.367,103.835 h1.52
  text "芯片背面地必须接" at 86.69,97.892 h1.52
  text "+" at 56.794,92.989 h2.29
  text "Auto_Display2" at 76.708,87.122 h1.52 r270
  text "+" at 61.443,85.623 h2.54
  text "芯片背面地必须接" at 45.187,76.505 h1.52
  text "+" at 101.6,74.117 h2.54
  text "+" at 60.935,73.381 h2.54
  text "Auto_Display3" at 74.473,61.087 h1.52 r270
  text "SCL SDA IRQ" at 81.229,56.744 h1.52 r270
  text "+" at 74.016,47.904 h2.54
  text "GND" at 78.257,42.774 h1.52
  text "+" at 35.662,37.16 h2.54
Top Solder:
  rectangle: 94.742,110.058 97.231,115.189
  rectangle: 77.953,43.713 81.178,48.539
  rectangle: 52.222,53.442 58.75,54.585
  rectangle: 51.232,98.069 52.248,103.073
  rectangle: 49.047,80.264 50.292,82.779
  lines w0.254: 93.726,91.084 94.882,92.241 98.33,92.241
  lines w0.508: 31.085,112.095 cw(c31.085,111.1) 32.08,111.1 32.08,108.026 ; 31.572,54.571 35.966,55.321 ; 87.99,113.229 87.99,119.761 ; 88.189,113.233 93.167,113.233
  lines w0.762: 43.454,104.521 48.819,104.521
  lines w1.016: 37.377,50.038 48.844,50.038 ; 46.247,45.053 50.067,48.873 ccw(c48.271,50.669) 50.811,50.669 ; 52.426,83.49 52.426,85.689 cw(c54.966,85.689) 53.17,87.485 ; 52.476,80.971 53.979,80.971 ; 53.19,87.506 cw(c54.987,85.71) 54.987,88.25 58.725,88.25 61.209,88.25 ; 53.31,82.22 ccw(c53.31,84.561) 54.966,82.906 55.548,83.488 cw(c57.344,81.692) 57.344,84.232 63.881,84.232 ; 54.901,80.62 57.633,80.62 ; 57.633,78.334 57.633,76.516 ccw(c60.173,76.516) 58.377,74.719 59.581,73.515 ccw(c61.377,75.311) 61.377,72.771 63.5,72.771 63.5,77.612
  text "KUNYEE_Staok" at 25.552,95.987 h1.52 r315
Bottom Solder:
  lines w0.508: 27.229,108.585 30.759,109.499
  lines w1.016: 48.057,50.038 48.844,50.038 57.709,50.038 58.318,50.648 58.318,52.045